# Altium PCB led_2835_curve_45X45cm.PcbDoc
Units mm, origin at the board's own origin, x right, y up, seen from the top; angles counter-clockwise.
Board outline 450 x 225 mm, 2 copper layers (Top Layer, Bottom Layer); 74 components, 68 nets, 148 pads, 0 vias.
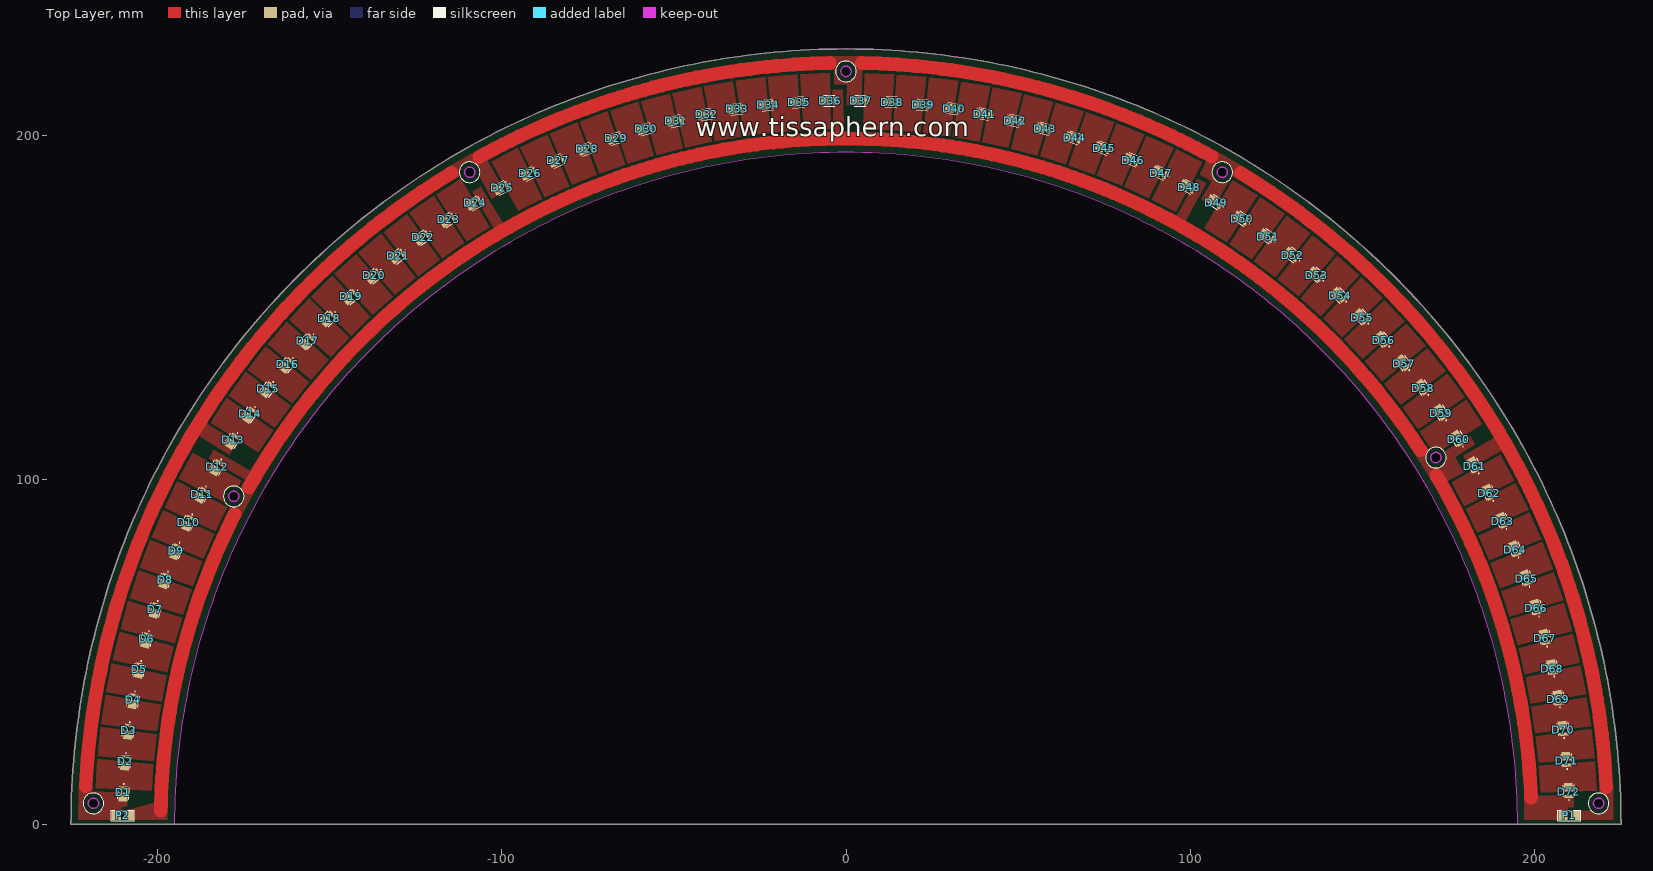
[diagram p0: Top Layer view]
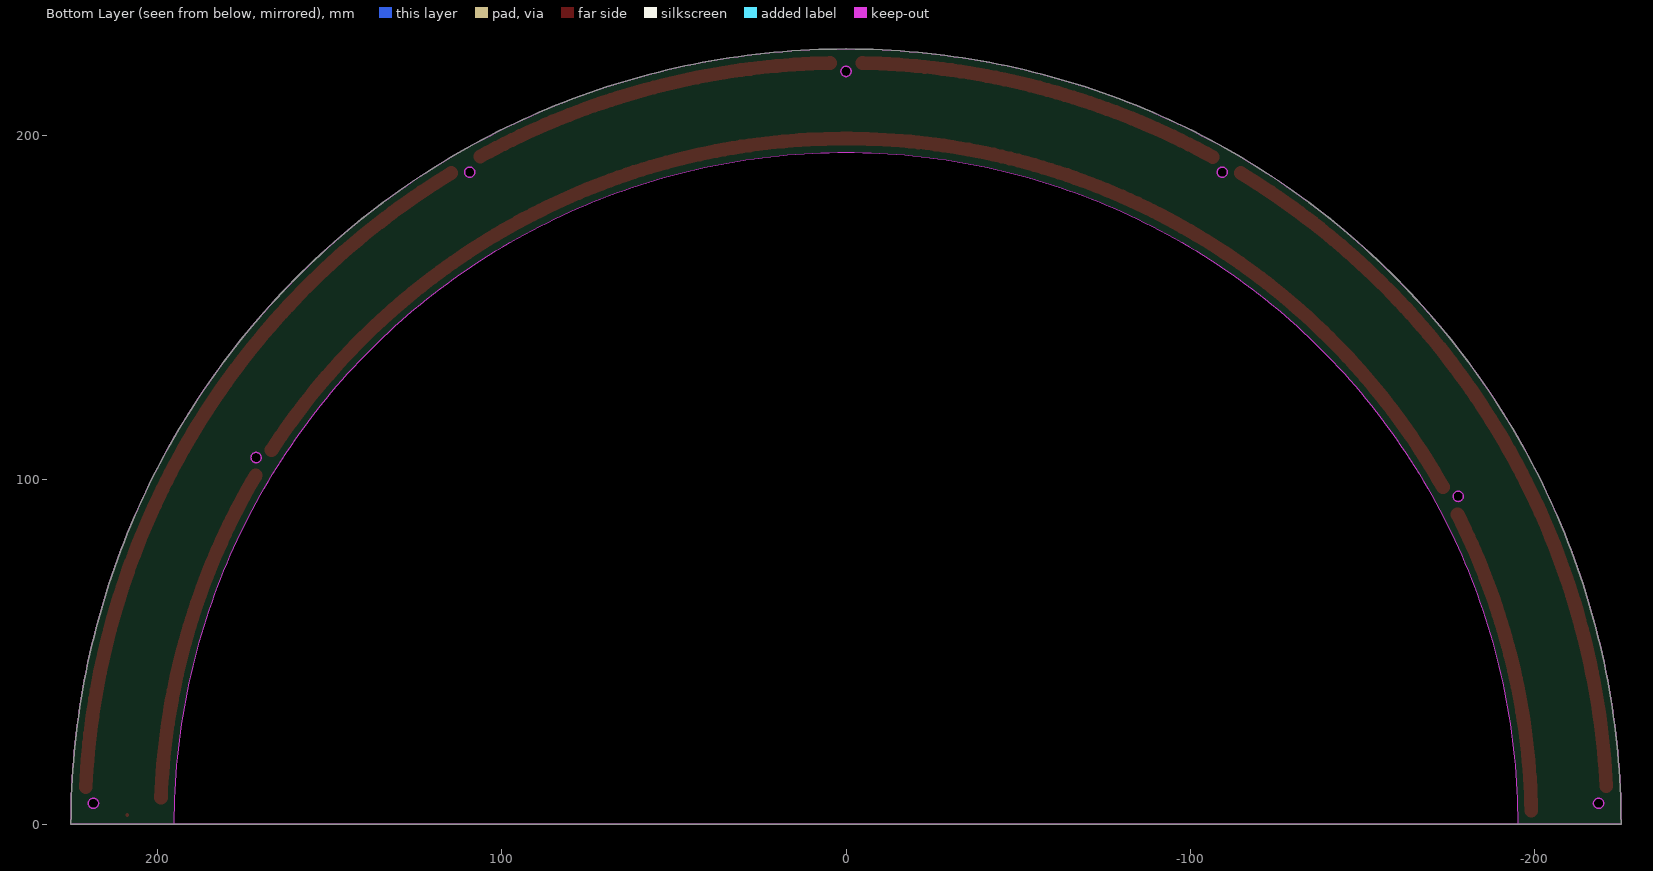
[diagram p1: Bottom Layer view, seen from below]

## Layer stack, top to bottom
Top Solder: solder mask 0.0102, Solder Resist, Dk 3.5
Top Layer: signal copper 0.0356
Dielectric 1: dielectric 0.32, FR-4, Dk 4.8
Bottom Layer: signal copper 0.0356
Bottom Solder: solder mask 0.0102, Solder Resist, Dk 3.5

## Board outline
-225,0 225,0 ccw(c0,0)
cut-out: -195,0 195,0 ccw(c0,0)
cut-out: -176.455,94.371 cw(c-177.754,95.121) -178.504,93.822 cw(c-177.754,95.121) -179.053,95.871 cw(c-177.754,95.121) -177.004,96.42 cw(c-177.754,95.121)
cut-out: 169.955,105.629 cw(c171.254,106.379) 170.504,107.678 cw(c171.254,106.379) 172.553,107.129 cw(c171.254,106.379) 172.004,105.08 cw(c171.254,106.379)
cut-out: 217,6 cw(c218.5,6) 218.5,7.5 cw(c218.5,6) 220,6 cw(c218.5,6) 218.5,4.5 cw(c218.5,6)
cut-out: 108.5,187.928 cw(c109.25,189.227) 107.951,189.977 cw(c109.25,189.227) 110,190.526 cw(c109.25,189.227) 110.549,188.477 cw(c109.25,189.227)
cut-out: 0,217 cw(c0,218.5) -1.5,218.5 cw(c0,218.5) 0,220 cw(c0,218.5) 1.5,218.5 cw(c0,218.5)
cut-out: -217,6 cw(c-218.5,6) -218.5,4.5 cw(c-218.5,6) -220,6 cw(c-218.5,6) -218.5,7.5 cw(c-218.5,6)
cut-out: -108.5,187.928 cw(c-109.25,189.227) -110.549,188.477 cw(c-109.25,189.227) -110,190.526 cw(c-109.25,189.227) -107.951,189.977 cw(c-109.25,189.227)
cut-out: 0,217 cw(c0,218.5) -1.5,218.5 cw(c0,218.5) 0,220 cw(c0,218.5) 1.5,218.5 cw(c0,218.5)

## Design rules (kind name [scope] priority, off if disabled: settings)
Clearance [All] p1: gap=0.254 ignorepadtopadclearanceinfootprint=FALSE except(0: Arc-Hole Track-Hole SMDPad-Hole THPad-Hole Via-Hole Fill-Hole Poly-Hole Region-Hole Text-Hole)
PolygonConnect PolygonConnect_2 [All vs IsNamedPolygon('NONET_L-01_P-001')] p1: connectstyle=Direct reliefconductorwidth=0.254 reliefentries=4 polygonreliefangle="90 Angle" airgapwidth=0.254
PolygonConnect PolygonConnect_1 [All vs IsNamedPolygon('NONET_L-01_P-001')] p2: connectstyle=Relief reliefconductorwidth=2.55 reliefentries=4 polygonreliefangle="90 Angle" airgapwidth=0.2
PolygonConnect [All] p3: connectstyle=Relief reliefconductorwidth=0.254 reliefentries=4 polygonreliefangle="90 Angle" airgapwidth=0.254
RoutingVias [All] p1: holewidth=0.711 width=1.27 viastyle="Through Hole" minholewidth=0.711 minwidth=1.27 maxholewidth=0.711 maxwidth=1.27
SolderMaskExpansion [All] p1: expansion=0.102 istentingtop=FALSE
Width [All] p1: maxlimit=10 minlimit=0.254 preferedwidth=0.254
30 further rules are at their usual default settings.

## Components (designator, comment, footprint, x,y, rotation, side; value= is the part's Value field where it differs from the comment)
D1 "OF-SMD2835Y" LED_OF-SMD2835Y -209.8,9.16 r267.5 top
D2 "OF-SMD2835Y" LED_OF-SMD2835Y -209.212,18.171 r265.04 top
D3 "OF-SMD2835Y" LED_OF-SMD2835Y -208.238,27.149 r262.57 top
D4 "OF-SMD2835Y" LED_OF-SMD2835Y -206.878,36.076 r260.11 top
D5 "OF-SMD2835Y" LED_OF-SMD2835Y -205.136,44.937 r257.64 top
D6 "OF-SMD2835Y" LED_OF-SMD2835Y -203.014,53.714 r255.18 top
D7 "OF-SMD2835Y" LED_OF-SMD2835Y -200.517,62.393 r252.72 top
D8 "OF-SMD2835Y" LED_OF-SMD2835Y -197.649,70.956 r250.25 top
D9 "OF-SMD2835Y" LED_OF-SMD2835Y -194.416,79.387 r247.79 top
D10 "OF-SMD2835Y" LED_OF-SMD2835Y -190.823,87.672 r245.32 top
D11 "OF-SMD2835Y" LED_OF-SMD2835Y -186.878,95.795 r242.86 top
D12 "OF-SMD2835Y" LED_OF-SMD2835Y -182.587,103.741 r240.4 top
D13 "OF-SMD2835Y" LED_OF-SMD2835Y -177.958,111.494 r237.93 top
D14 "OF-SMD2835Y" LED_OF-SMD2835Y -173,119.042 r235.47 top
D15 "OF-SMD2835Y" LED_OF-SMD2835Y -167.722,126.369 r233 top
D16 "OF-SMD2835Y" LED_OF-SMD2835Y -162.134,133.463 r230.54 top
D17 "OF-SMD2835Y" LED_OF-SMD2835Y -156.247,140.31 r228.08 top
D18 "OF-SMD2835Y" LED_OF-SMD2835Y -150.07,146.898 r225.61 top
D19 "OF-SMD2835Y" LED_OF-SMD2835Y -143.616,153.214 r223.15 top
D20 "OF-SMD2835Y" LED_OF-SMD2835Y -136.896,159.246 r220.68 top
D21 "OF-SMD2835Y" LED_OF-SMD2835Y -129.923,164.985 r218.22 top
D22 "OF-SMD2835Y" LED_OF-SMD2835Y -122.71,170.418 r215.76 top
D23 "OF-SMD2835Y" LED_OF-SMD2835Y -115.27,175.536 r213.29 top
D24 "OF-SMD2835Y" LED_OF-SMD2835Y -107.617,180.329 r210.83 top
D25 "OF-SMD2835Y" LED_OF-SMD2835Y -99.765,184.789 r208.36 top
D26 "OF-SMD2835Y" LED_OF-SMD2835Y -91.728,188.907 r205.9 top
D27 "OF-SMD2835Y" LED_OF-SMD2835Y -83.522,192.676 r203.44 top
D28 "OF-SMD2835Y" LED_OF-SMD2835Y -75.161,196.089 r200.97 top
D29 "OF-SMD2835Y" LED_OF-SMD2835Y -66.662,199.139 r198.51 top
D30 "OF-SMD2835Y" LED_OF-SMD2835Y -58.039,201.82 r196.04 top
D31 "OF-SMD2835Y" LED_OF-SMD2835Y -49.309,204.129 r193.58 top
D32 "OF-SMD2835Y" LED_OF-SMD2835Y -40.487,206.06 r191.12 top
D33 "OF-SMD2835Y" LED_OF-SMD2835Y -31.591,207.61 r188.65 top
D34 "OF-SMD2835Y" LED_OF-SMD2835Y -22.636,208.776 r186.19 top
D35 "OF-SMD2835Y" LED_OF-SMD2835Y -13.64,209.557 r183.72 top
D36 "OF-SMD2835Y" LED_OF-SMD2835Y -4.618,209.949 r181.26 top
D37 "OF-SMD2835Y" LED_OF-SMD2835Y 4.413,209.954 r178.8 top
D38 "OF-SMD2835Y" LED_OF-SMD2835Y 13.435,209.57 r176.33 top
D39 "OF-SMD2835Y" LED_OF-SMD2835Y 22.432,208.798 r173.87 top
D40 "OF-SMD2835Y" LED_OF-SMD2835Y 31.388,207.641 r171.4 top
D41 "OF-SMD2835Y" LED_OF-SMD2835Y 40.286,206.1 r168.94 top
D42 "OF-SMD2835Y" LED_OF-SMD2835Y 49.109,204.177 r166.48 top
D43 "OF-SMD2835Y" LED_OF-SMD2835Y 57.842,201.877 r164.01 top
D44 "OF-SMD2835Y" LED_OF-SMD2835Y 66.467,199.204 r161.55 top
D45 "OF-SMD2835Y" LED_OF-SMD2835Y 74.97,196.162 r159.08 top
D46 "OF-SMD2835Y" LED_OF-SMD2835Y 83.334,192.758 r156.62 top
D47 "OF-SMD2835Y" LED_OF-SMD2835Y 91.544,188.997 r154.16 top
D48 "OF-SMD2835Y" LED_OF-SMD2835Y 99.584,184.886 r151.69 top
D49 "OF-SMD2835Y" LED_OF-SMD2835Y 107.441,180.434 r149.23 top
D50 "OF-SMD2835Y" LED_OF-SMD2835Y 115.099,175.648 r146.76 top
D51 "OF-SMD2835Y" LED_OF-SMD2835Y 122.544,170.538 r144.3 top
D52 "OF-SMD2835Y" LED_OF-SMD2835Y 129.762,165.112 r141.84 top
D53 "OF-SMD2835Y" LED_OF-SMD2835Y 136.74,159.38 r139.37 top
D54 "OF-SMD2835Y" LED_OF-SMD2835Y 143.466,153.354 r136.91 top
D55 "OF-SMD2835Y" LED_OF-SMD2835Y 149.926,147.044 r134.44 top
D56 "OF-SMD2835Y" LED_OF-SMD2835Y 156.109,140.463 r131.98 top
D57 "OF-SMD2835Y" LED_OF-SMD2835Y 162.004,133.622 r129.52 top
D58 "OF-SMD2835Y" LED_OF-SMD2835Y 167.599,126.533 r127.05 top
D59 "OF-SMD2835Y" LED_OF-SMD2835Y 172.884,119.211 r124.59 top
D60 "OF-SMD2835Y" LED_OF-SMD2835Y 177.849,111.668 r122.12 top
D61 "OF-SMD2835Y" LED_OF-SMD2835Y 182.485,103.919 r119.66 top
D62 "OF-SMD2835Y" LED_OF-SMD2835Y 186.784,95.978 r117.2 top
D63 "OF-SMD2835Y" LED_OF-SMD2835Y 190.738,87.859 r114.73 top
D64 "OF-SMD2835Y" LED_OF-SMD2835Y 194.339,79.577 r112.27 top
D65 "OF-SMD2835Y" LED_OF-SMD2835Y 197.58,71.149 r109.8 top
D66 "OF-SMD2835Y" LED_OF-SMD2835Y 200.456,62.589 r107.34 top
D67 "OF-SMD2835Y" LED_OF-SMD2835Y 202.962,53.913 r104.88 top
D68 "OF-SMD2835Y" LED_OF-SMD2835Y 205.092,45.137 r102.41 top
D69 "OF-SMD2835Y" LED_OF-SMD2835Y 206.843,36.278 r99.95 top
D70 "OF-SMD2835Y" LED_OF-SMD2835Y 208.211,27.352 r97.48 top
D71 "OF-SMD2835Y" LED_OF-SMD2835Y 209.194,18.376 r95.02 top
D72 "OF-SMD2835Y" LED_OF-SMD2835Y 209.791,9.365 r92.56 top
P1 "Header 2" HDR1X2_SMD 210,2.5 r180 top
P2 "Header 2" HDR1X2_SMD -210,2.5 r0 top

## Footprints (in the part's own frame and the unit in brackets; to place one, negate y for a bottom-side part, rotate by r counter-clockwise, add the part's x,y. Pads: shape width x height; smd on the part's side, far side on the other; paste and mask are expansions set on the pad)
HDR1X2_SMD [mm] "Connector; Header; 2 Position"
  rect 2.6x2.55 smd: 1(-1.778,0) 2(1.778,0)
  silkscreen extent -3.33,-1.5 3.33,1.5
LED_OF-SMD2835Y [mm]
  rect 2.6x2.55 smd: A(1.325,0)
  rect 1x2.55 smd: C(-1.325,0)
  silkscreen extent -2.52,-1.6 1.92,1.59

## Part data
D1 D2 D3 D4 D5 D6 D7 D8 D9 D10 D11 D12 D13 D14 D15 D16 D17 D18 D19 D20 D21 D22 D23 D24 D25 D26 D27 D28 D29 D30 D31 D32 D33 D34 D35 D36 D37 D38 D39 D40 D41 D42 D43 D44 D45 D46 D47 D48 D49 D50 D51 D52 D53 D54 D55 D56 D57 D58 D59 D60 D61 D62 D63 D64 D65 D66 D67 D68 D69 D70 D71 D72: "LED; SMD; 2835, PLCC2; yellow; 2200-2800mcd; 2.8x3.5x0.75mm; 120Â°", Package=None, Availability=Unavailable, MP=OF-SMD2835Y, Price=None
P1 P2: "Header, 2-Pin", LatestRevisionDate=17-Jul-2002, LatestRevisionNote="Re-released for DXP Platform.", Publisher="Altium Limited"

## Nets (pads, with @x,y where several pads share a name; then routed paths per layer and width w, separated by ;. In a path a pad name is that pad's centre, name@x,y a point inside that pad or via, vN(x,y) a via of type N, cw(c..) or ccw(c..) an arc to the next point about the centre after c; other vN are vias at no path point)
GND: D12.C D24.C D36.C D48.C D60.C D72.C P1.2 P2.2 | length 596.2
  Top Layer w1: P1.2@208.73,2.5 P1.2@208.73,2.635
  Top Layer w4: -198.963,3.85 cw(c0,0) -177.549,89.873 ; -173.297,97.821 cw(c0,0) 166.774,108.57 ; 171.346,101.237 cw(c0.022,0) 198.875,7.637
NetD1_C: D1.C D2.A
NetD2_C: D2.C D3.A
NetD3_C: D3.C D4.A
NetD4_C: D4.C D5.A
NetD5_C: D5.C D6.A
NetD6_C: D6.C D7.A
NetD7_C: D7.C D8.A
NetD8_C: D8.C D9.A
NetD9_C: D9.C D10.A
NetD10_C: D10.C D11.A
NetD11_C: D11.C D12.A
NetD13_C: D13.C D14.A
NetD14_C: D14.C D15.A
NetD15_C: D15.C D16.A
NetD16_C: D16.C D17.A
NetD17_C: D17.C D18.A
NetD18_C: D18.C D19.A
NetD19_C: D19.C D20.A
NetD20_C: D20.C D21.A
NetD21_C: D21.C D22.A
NetD22_C: D22.C D23.A
NetD23_C: D23.C D24.A
NetD25_C: D25.C D26.A
NetD26_C: D26.C D27.A
NetD27_C: D27.C D28.A
NetD28_C: D28.C D29.A
NetD29_C: D29.C D30.A
NetD30_C: D30.C D31.A
NetD31_C: D31.C D32.A
NetD32_C: D32.C D33.A
NetD33_C: D33.C D34.A
NetD34_C: D34.C D35.A
NetD35_C: D35.C D36.A
NetD37_C: D37.C D38.A
NetD38_C: D38.C D39.A
NetD39_C: D39.C D40.A
NetD40_C: D40.C D41.A
NetD41_C: D41.C D42.A
NetD42_C: D42.C D43.A
NetD43_C: D43.C D44.A
NetD44_C: D44.C D45.A
NetD45_C: D45.C D46.A
NetD46_C: D46.C D47.A
NetD47_C: D47.C D48.A
NetD49_C: D49.C D50.A
NetD50_C: D50.C D51.A
NetD51_C: D51.C D52.A
NetD52_C: D52.C D53.A
NetD53_C: D53.C D54.A
NetD54_C: D54.C D55.A
NetD55_C: D55.C D56.A
NetD56_C: D56.C D57.A
NetD57_C: D57.C D58.A
NetD58_C: D58.C D59.A
NetD59_C: D59.C D60.A
NetD61_C: D61.C D62.A
NetD62_C: D62.C D63.A
NetD63_C: D63.C D64.A
NetD64_C: D64.C D65.A
NetD65_C: D65.C D66.A
NetD66_C: D66.C D67.A
NetD67_C: D67.C D68.A
NetD68_C: D68.C D69.A
NetD69_C: D69.C D70.A
NetD70_C: D70.C D71.A
NetD71_C: D71.C D72.A
VCC: D1.A D13.A D25.A D37.A D49.A D61.A P1.1 P2.1 | length 644.1
  Top Layer w4: -220.73,10.93 cw(c0,0) -114.581,188.977 ; -106.476,193.659 cw(c0,0) -4.756,220.949 ; 4.678,220.95 cw(c0,0) 106.172,193.826 ; 114.577,188.979 cw(c0,0) 220.737,10.781

## Polygon pours and split planes (outlines as drawn)
GND on Top Layer "NONET_L-01_P-001" (solid, remove dead copper, pour order 377): 175.265,109.079 179.336,102.136 172.991,98.637 169.083,105.227
VCC on Top Layer "NONET_L-01_P-001" (solid, remove dead copper, pour order 376): -218.736,10.807 -218.87,9.192 -222.73,9.369 -222.721,11.001
GND on Top Layer "NONET_L-01_P-001" (solid, remove dead copper, pour order 375): 181.026,112.694 182.627,110.188 169.848,102.131 168.268,104.65
VCC on Top Layer "NONET_L-01_P-001" (solid, remove dead copper, pour order 374): 190.785,113.53 179.209,106.902 181.279,103.26 192.882,109.884
GND on Top Layer "NONET_L-01_P-001" (solid, remove dead copper, pour order 373): 101.903,187.391 104.519,185.975 97.248,172.732 94.645,174.169
VCC on Top Layer "NONET_L-01_P-001" (solid, remove dead copper, pour order 372): 110.034,192.853 103.123,181.444 106.698,179.261 113.635,190.68
GND on Top Layer "NONET_L-01_P-001" (solid, remove dead copper, pour order 371): -185.016,106.083 -183.555,108.673 -170.441,101.172 -171.923,98.595
VCC on Top Layer "NONET_L-01_P-001" (solid, remove dead copper, pour order 370): -190.335,114.307 -179.049,107.198 -176.804,110.735 -188.1,117.87
GND on Top Layer "NONET_L-01_P-001" (solid, remove dead copper, pour order 369): -108.568,183.489 -106.034,185.047 -98.201,172.128 -100.747,170.593
VCC on Top Layer "NONET_L-01_P-001" (solid, remove dead copper, pour order 368): -109.233,193.261 -102.808,181.572 -99.13,183.577 -105.551,195.294
GND on Top Layer "NONET_L-01_P-001" (solid, remove dead copper, pour order 367): -3.861,213.219 -0.888,213.301 -0.564,198.197 -3.536,198.14
VCC on Top Layer "NONET_L-01_P-001" (solid, remove dead copper, pour order 366): 0.449,222.015 0.168,208.679 4.356,208.577 4.654,221.934
GND on Top Layer "NONET_L-01_P-001" (solid, remove dead copper, pour order 365): 211.078,8.59 211.269,4.929 207.096,4.801 207.083,8.426
GND on Top Layer "NONET_L-01_P-001" (solid, remove dead copper, pour order 177): -175.165,98.547 -179.195,91.014 -175.668,89.149 -171.658,96.718
NetD71_C on Top Layer "NONET_L-01_P-001" (solid, remove dead copper, pour order 356): 217.319,18.257 217.951,9.72 201.641,9.053 201.141,16.847
NetD70_C on Top Layer "NONET_L-01_P-001" (solid, remove dead copper, pour order 355): 216.333,27.583 217.332,19.081 201.066,17.714 200.231,25.479
NetD69_C on Top Layer "NONET_L-01_P-001" (solid, remove dead copper, pour order 354): 214.947,36.858 216.311,28.406 200.118,26.341 198.95,34.064
NetD68_C on Top Layer "NONET_L-01_P-001" (solid, remove dead copper, pour order 353): 213.164,46.065 214.889,37.68 198.801,34.92 197.302,42.586
NetD67_C on Top Layer "NONET_L-01_P-001" (solid, remove dead copper, pour order 352): 210.987,55.186 213.071,46.883 197.116,43.435 195.289,51.028
NetD66_C on Top Layer "NONET_L-01_P-001" (solid, remove dead copper, pour order 351): 208.419,64.206 210.858,56 195.066,51.869 192.914,59.377
NetD65_C on Top Layer "NONET_L-01_P-001" (solid, remove dead copper, pour order 350): 205.466,73.107 208.256,65.014 192.656,60.207 190.183,67.616
NetD64_C on Top Layer "NONET_L-01_P-001" (solid, remove dead copper, pour order 349): 202.133,81.873 205.268,73.907 189.889,68.434 187.1,75.73
NetD63_C on Top Layer "NONET_L-01_P-001" (solid, remove dead copper, pour order 348): 198.426,90.487 201.901,82.663 186.772,76.535 183.672,83.703
NetD62_C on Top Layer "NONET_L-01_P-001" (solid, remove dead copper, pour order 347): 194.353,98.934 198.16,91.267 183.309,84.493 179.903,91.522
NetD61_C on Top Layer "NONET_L-01_P-001" (solid, remove dead copper, pour order 346): 189.92,107.198 194.054,99.702 179.507,92.296 175.802,99.172
NetD59_C on Top Layer "NONET_L-01_P-001" (solid, remove dead copper, pour order 344): 180.009,123.117 184.771,116.003 170.914,107.375 166.633,113.908
NetD58_C on Top Layer "NONET_L-01_P-001" (solid, remove dead copper, pour order 343): 174.549,130.742 179.613,123.84 166.14,114.624 161.582,120.966
NetD57_C on Top Layer "NONET_L-01_P-001" (solid, remove dead copper, pour order 342): 168.767,138.125 174.123,131.447 161.059,121.66 156.232,127.801
NetD56_C on Top Layer "NONET_L-01_P-001" (solid, remove dead copper, pour order 341): 162.673,145.253 168.311,138.811 155.679,128.472 150.593,134.4
NetD55_C on Top Layer "NONET_L-01_P-001" (solid, remove dead copper, pour order 340): 156.278,152.112 162.188,145.919 150.012,135.046 144.676,140.749
NetD54_C on Top Layer "NONET_L-01_P-001" (solid, remove dead copper, pour order 339): 149.594,158.69 155.765,152.757 144.068,141.371 138.491,146.839
NetD53_C on Top Layer "NONET_L-01_P-001" (solid, remove dead copper, pour order 338): 142.633,164.975 149.053,159.312 137.857,147.434 132.05,152.657
NetD52_C on Top Layer "NONET_L-01_P-001" (solid, remove dead copper, pour order 337): 135.409,170.954 142.066,165.573 131.391,153.224 125.365,158.193
NetD51_C on Top Layer "NONET_L-01_P-001" (solid, remove dead copper, pour order 336): 127.934,176.618 134.817,171.527 124.682,158.731 118.448,163.437
NetD50_C on Top Layer "NONET_L-01_P-001" (solid, remove dead copper, pour order 335): 120.223,181.954 127.318,177.165 117.743,163.945 111.312,168.378
NetD49_C on Top Layer "NONET_L-01_P-001" (solid, remove dead copper, pour order 334): 112.289,186.955 119.584,182.475 110.585,168.855 103.971,173.008
NetD47_C on Top Layer "NONET_L-01_P-001" (solid, remove dead copper, pour order 332): 95.814,195.91 103.466,192.073 95.671,177.73 88.724,181.3
NetD46_C on Top Layer "NONET_L-01_P-001" (solid, remove dead copper, pour order 331): 87.303,199.848 95.113,196.343 87.942,181.679 80.848,184.946
NetD45_C on Top Layer "NONET_L-01_P-001" (solid, remove dead copper, pour order 330): 78.63,203.416 86.584,200.251 80.05,185.292 72.822,188.251
NetD44_C on Top Layer "NONET_L-01_P-001" (solid, remove dead copper, pour order 329): 69.812,206.609 77.895,203.788 72.01,188.562 64.661,191.208
NetD43_C on Top Layer "NONET_L-01_P-001" (solid, remove dead copper, pour order 328): 60.865,209.419 69.062,206.949 63.837,191.484 56.381,193.811
NetD42_C on Top Layer "NONET_L-01_P-001" (solid, remove dead copper, pour order 327): 51.806,211.842 60.101,209.726 55.546,194.051 47.997,196.056
NetD41_C on Top Layer "NONET_L-01_P-001" (solid, remove dead copper, pour order 326): 42.65,213.873 51.029,212.116 47.152,196.26 39.524,197.938
NetD40_C on Top Layer "NONET_L-01_P-001" (solid, remove dead copper, pour order 325): 33.416,215.509 41.862,214.114 38.671,198.105 30.978,199.454
NetD39_C on Top Layer "NONET_L-01_P-001" (solid, remove dead copper, pour order 324): 24.12,216.747 32.618,215.716 30.118,199.585 22.374,200.602
NetD38_C on Top Layer "NONET_L-01_P-001" (solid, remove dead copper, pour order 323): 14.78,217.583 23.314,216.919 21.51,200.695 13.729,201.378
NetD37_C on Top Layer "NONET_L-01_P-001" (solid, remove dead copper, pour order 322): 5.412,218.017 13.967,217.72 12.861,201.434 5.059,201.782
NetD35_C on Top Layer "NONET_L-01_P-001" (solid, remove dead copper, pour order 320): -13.337,217.676 -4.788,218.115 -4.49,201.794 -12.294,201.471
NetD34_C on Top Layer "NONET_L-01_P-001" (solid, remove dead copper, pour order 319): -22.683,216.902 -14.16,217.708 -13.161,201.415 -20.944,200.756
NetD33_C on Top Layer "NONET_L-01_P-001" (solid, remove dead copper, pour order 318): -31.987,215.726 -23.507,216.898 -21.808,200.663 -29.555,199.67
NetD32_C on Top Layer "NONET_L-01_P-001" (solid, remove dead copper, pour order 317): -41.232,214.151 -32.81,215.687 -30.415,199.54 -38.112,198.215
NetD31_C on Top Layer "NONET_L-01_P-001" (solid, remove dead copper, pour order 316): -50.4,212.181 -42.052,214.077 -38.965,198.048 -46.598,196.393
NetD30_C on Top Layer "NONET_L-01_P-001" (solid, remove dead copper, pour order 315): -59.476,209.818 -51.217,212.071 -47.444,196.189 -54.999,194.208
NetD29_C on Top Layer "NONET_L-01_P-001" (solid, remove dead copper, pour order 314): -68.441,207.067 -60.287,209.673 -55.834,193.968 -63.297,191.664
NetD28_C on Top Layer "NONET_L-01_P-001" (solid, remove dead copper, pour order 313): -77.28,203.933 -69.245,206.887 -64.122,191.388 -71.479,188.765
NetD27_C on Top Layer "NONET_L-01_P-001" (solid, remove dead copper, pour order 312): -85.976,200.422 -78.076,203.719 -72.291,188.455 -79.528,185.518
NetD26_C on Top Layer "NONET_L-01_P-001" (solid, remove dead copper, pour order 311): -94.513,196.54 -86.762,200.174 -80.326,185.173 -87.43,181.927
NetD25_C on Top Layer "NONET_L-01_P-001" (solid, remove dead copper, pour order 310): -102.875,192.295 -95.287,196.259 -88.212,181.548 -95.171,178
NetD23_C on Top Layer "NONET_L-01_P-001" (solid, remove dead copper, pour order 308): -119.014,182.747 -111.794,187.348 -103.482,173.299 -110.11,169.167
NetD22_C on Top Layer "NONET_L-01_P-001" (solid, remove dead copper, pour order 307): -126.76,177.462 -119.745,182.368 -110.837,168.69 -117.281,164.277
NetD21_C on Top Layer "NONET_L-01_P-001" (solid, remove dead copper, pour order 306): -134.273,171.848 -127.475,177.052 -117.987,163.769 -124.235,159.083
NetD20_C on Top Layer "NONET_L-01_P-001" (solid, remove dead copper, pour order 305): -141.536,165.917 -134.969,171.408 -124.918,158.545 -130.959,153.595
NetD19_C on Top Layer "NONET_L-01_P-001" (solid, remove dead copper, pour order 304): -148.539,159.678 -142.213,165.447 -131.619,153.028 -137.441,147.822
NetD18_C on Top Layer "NONET_L-01_P-001" (solid, remove dead copper, pour order 303): -155.266,153.145 -149.195,159.18 -138.076,147.228 -143.669,141.777
NetD17_C on Top Layer "NONET_L-01_P-001" (solid, remove dead copper, pour order 302): -161.706,146.328 -155.9,152.618 -144.278,141.156 -149.632,135.469
NetD16_C on Top Layer "NONET_L-01_P-001" (solid, remove dead copper, pour order 301): -167.848,139.241 -162.317,145.775 -150.213,134.823 -155.317,128.911
NetD15_C on Top Layer "NONET_L-01_P-001" (solid, remove dead copper, pour order 300): -173.679,131.896 -168.434,138.662 -155.87,128.24 -160.716,122.115
NetD14_C on Top Layer "NONET_L-01_P-001" (solid, remove dead copper, pour order 299): -179.189,124.307 -174.24,131.292 -161.24,121.42 -165.817,115.092
NetD13_C on Top Layer "NONET_L-01_P-001" (solid, remove dead copper, pour order 298): -184.367,116.489 -179.723,123.68 -166.311,114.376 -170.612,107.857
NetD11_C on Top Layer "NONET_L-01_P-001" (solid, remove dead copper, pour order 296): -193.692,100.22 -189.683,107.784 -175.521,99.667 -179.247,92.802
NetD10_C on Top Layer "NONET_L-01_P-001" (solid, remove dead copper, pour order 295): -197.822,91.8 -194.142,99.53 -179.644,92.029 -183.071,85.01
NetD9_C on Top Layer "NONET_L-01_P-001" (solid, remove dead copper, pour order 294): -201.586,83.211 -198.241,91.091 -183.434,84.22 -186.556,77.061
NetD8_C on Top Layer "NONET_L-01_P-001" (solid, remove dead copper, pour order 293): -204.977,74.467 -201.974,82.484 -186.885,76.256 -189.697,68.97
NetD7_C on Top Layer "NONET_L-01_P-001" (solid, remove dead copper, pour order 292): -207.989,65.586 -205.334,73.725 -189.991,68.151 -192.486,60.75
NetD6_C on Top Layer "NONET_L-01_P-001" (solid, remove dead copper, pour order 291): -210.616,56.584 -208.313,64.829 -192.745,59.92 -194.92,52.419
NetD5_C on Top Layer "NONET_L-01_P-001" (solid, remove dead copper, pour order 290): -212.854,47.477 -210.908,55.813 -195.143,51.578 -196.993,43.991
NetD4_C on Top Layer "NONET_L-01_P-001" (solid, remove dead copper, pour order 289): -214.698,38.282 -213.112,46.694 -197.18,43.141 -198.703,35.481
NetD3_C on Top Layer "NONET_L-01_P-001" (solid, remove dead copper, pour order 288): -216.146,29.016 -214.923,37.489 -198.852,34.624 -200.044,26.905
NetD2_C on Top Layer "NONET_L-01_P-001" (solid, remove dead copper, pour order 287): -217.193,19.697 -216.336,28.215 -200.157,26.043 -201.016,18.28
NetD1_C on Top Layer "NONET_L-01_P-001" (solid, remove dead copper, pour order 286): -217.839,10.341 -217.349,18.888 -201.092,17.414 -201.616,9.621
VCC on Top Layer "NONET_L-01_P-001" (solid, remove dead copper, pour order 285): -210.512,1.298 -222.938,1.111 -222.832,5.105 -210.478,5.202
VCC on Top Layer "NONET_L-01_P-001" (solid, remove dead copper, pour order 283): -208.53,9.072 -222.72,9.724 -222.931,1.358 -208.697,5.194
VCC on Top Layer "NONET_L-01_P-001" (solid, remove dead copper, pour order 190): 109.828,184.495 102.692,188.688 105.755,194.619 113.515,190.439
NetD1_C on Top Layer "NONET_L-01_P-001" (solid, remove dead copper, pour order 197): -217.839,10.341 -217.349,18.888 -201.092,17.414 -201.616,9.621
VCC on Top Layer "NONET_L-01_P-001" (solid, remove dead copper, pour order 192): 222.731,1.172 222.731,10.75 218.753,10.516 219.007,1.189
VCC on Top Layer "NONET_L-01_P-001" (solid, remove dead copper, pour order 191): 4.562,214.726 -3.415,214.726 -3.415,222.308 4.809,222.551
VCC on Top Layer "NONET_L-01_P-001" (solid, remove dead copper, pour order 160): -115.666,190.658 -107.541,195.332 -105.549,191.895 -113.612,187.224
VCC on Top Layer "NONET_L-01_P-001" (solid, remove dead copper, pour order 171): -4.78,222.948 4.6,222.948 3.898,218.975 -4.708,218.953
VCC on Top Layer "NONET_L-01_P-001" (solid, remove dead copper, pour order 165): 115.351,190.805 113.379,187.377 105.388,191.984 107.36,195.405
GND on Top Layer "NONET_L-01_P-001" (solid, remove dead copper, pour order 176): 168.407,109.694 173.143,102.127 169.553,100.348 165.127,107.436
VCC on Top Layer "NONET_L-01_P-001" (solid, remove dead copper, pour order 167): 210.45,3.808 222.734,3.84 222.734,1.216 210.443,1.19
GND on Top Layer "NONET_L-01_P-001" (solid, remove dead copper, pour order 175): 196.984,1.187 209.515,1.232 209.515,8.527 196.865,8.049
GND on Top Layer "NONET_L-01_P-001" (solid, remove dead copper, pour order 172): -209.528,3.787 -196.899,7.157 -197.056,1.205 -209.511,1.231

## Keep-outs
Keep-Out Layer:
  circle w0.2: c-177.754,95.121 r1.5
  circle w0.2: c171.254,106.379 r1.5
  circle w0.2: c218.5,6 r1.5
  circle w0.2: c109.25,189.227 r1.5
  circle w0.2: c0,218.5 r1.5
  circle w0.2: c-218.5,6 r1.5
  circle w0.2: c-109.25,189.227 r1.5
  circle w0.2: c0,218.5 r1.5
  lines w0.2: -225,0 cw(c0,0) 225,0 -225,0 ; -195,0 cw(c0,0) 195,0 -195,0

## Other copper
Multi-Layer:
  pour cut-out: -218.5,3 cw(c-218.5,6) -221.5,6 cw(c-218.5,6) -218.5,9 cw(c-218.5,6) -215.5,6 cw(c-218.5,6)
  pour cut-out: 215.5,6 ccw(c218.5,6) 218.5,3 ccw(c218.5,6) 221.5,6 ccw(c218.5,6) 218.5,9 ccw(c218.5,6)
  pour cut-out: 168.254,106.379 ccw(c171.254,106.379) 171.254,103.379 ccw(c171.254,106.379) 174.254,106.379 ccw(c171.254,106.379) 171.254,109.379 ccw(c171.254,106.379)
  pour cut-out: 109.25,186.227 cw(c109.25,189.227) 106.25,189.227 cw(c109.25,189.227) 109.25,192.227 cw(c109.25,189.227) 112.25,189.227 cw(c109.25,189.227)
  pour cut-out: -177.754,92.121 cw(c-177.754,95.121) -180.754,95.121 cw(c-177.754,95.121) -177.754,98.121 cw(c-177.754,95.121) -174.754,95.121 cw(c-177.754,95.121)
  pour cut-out: -109.25,186.227 cw(c-109.25,189.227) -112.25,189.227 cw(c-109.25,189.227) -109.25,192.227 cw(c-109.25,189.227) -106.25,189.227 cw(c-109.25,189.227)
  pour cut-out: 0,215.5 cw(c0,218.5) -3,218.5 cw(c0,218.5) 0,221.5 cw(c0,218.5) 3,218.5 cw(c0,218.5)

## Silkscreen, mask and mechanical layers (free items; w line width, h text height)
Top Overlay:
  circle w0.1: c171.254,106.379 r3
  circle w0.1: c-177.754,95.121 r3
  circle w0.1: c218.5,6 r3
  circle w0.1: c109.25,189.227 r3
  circle w0.1: c-218.5,6 r3
  circle w0.1: c-109.25,189.227 r3
  circle w0.1: c0,218.5 r3
  text "www.tissaphern.com" at -43.562,197.814 h9.5